# EAGLE board me433 (EAGLE 9.6.2)
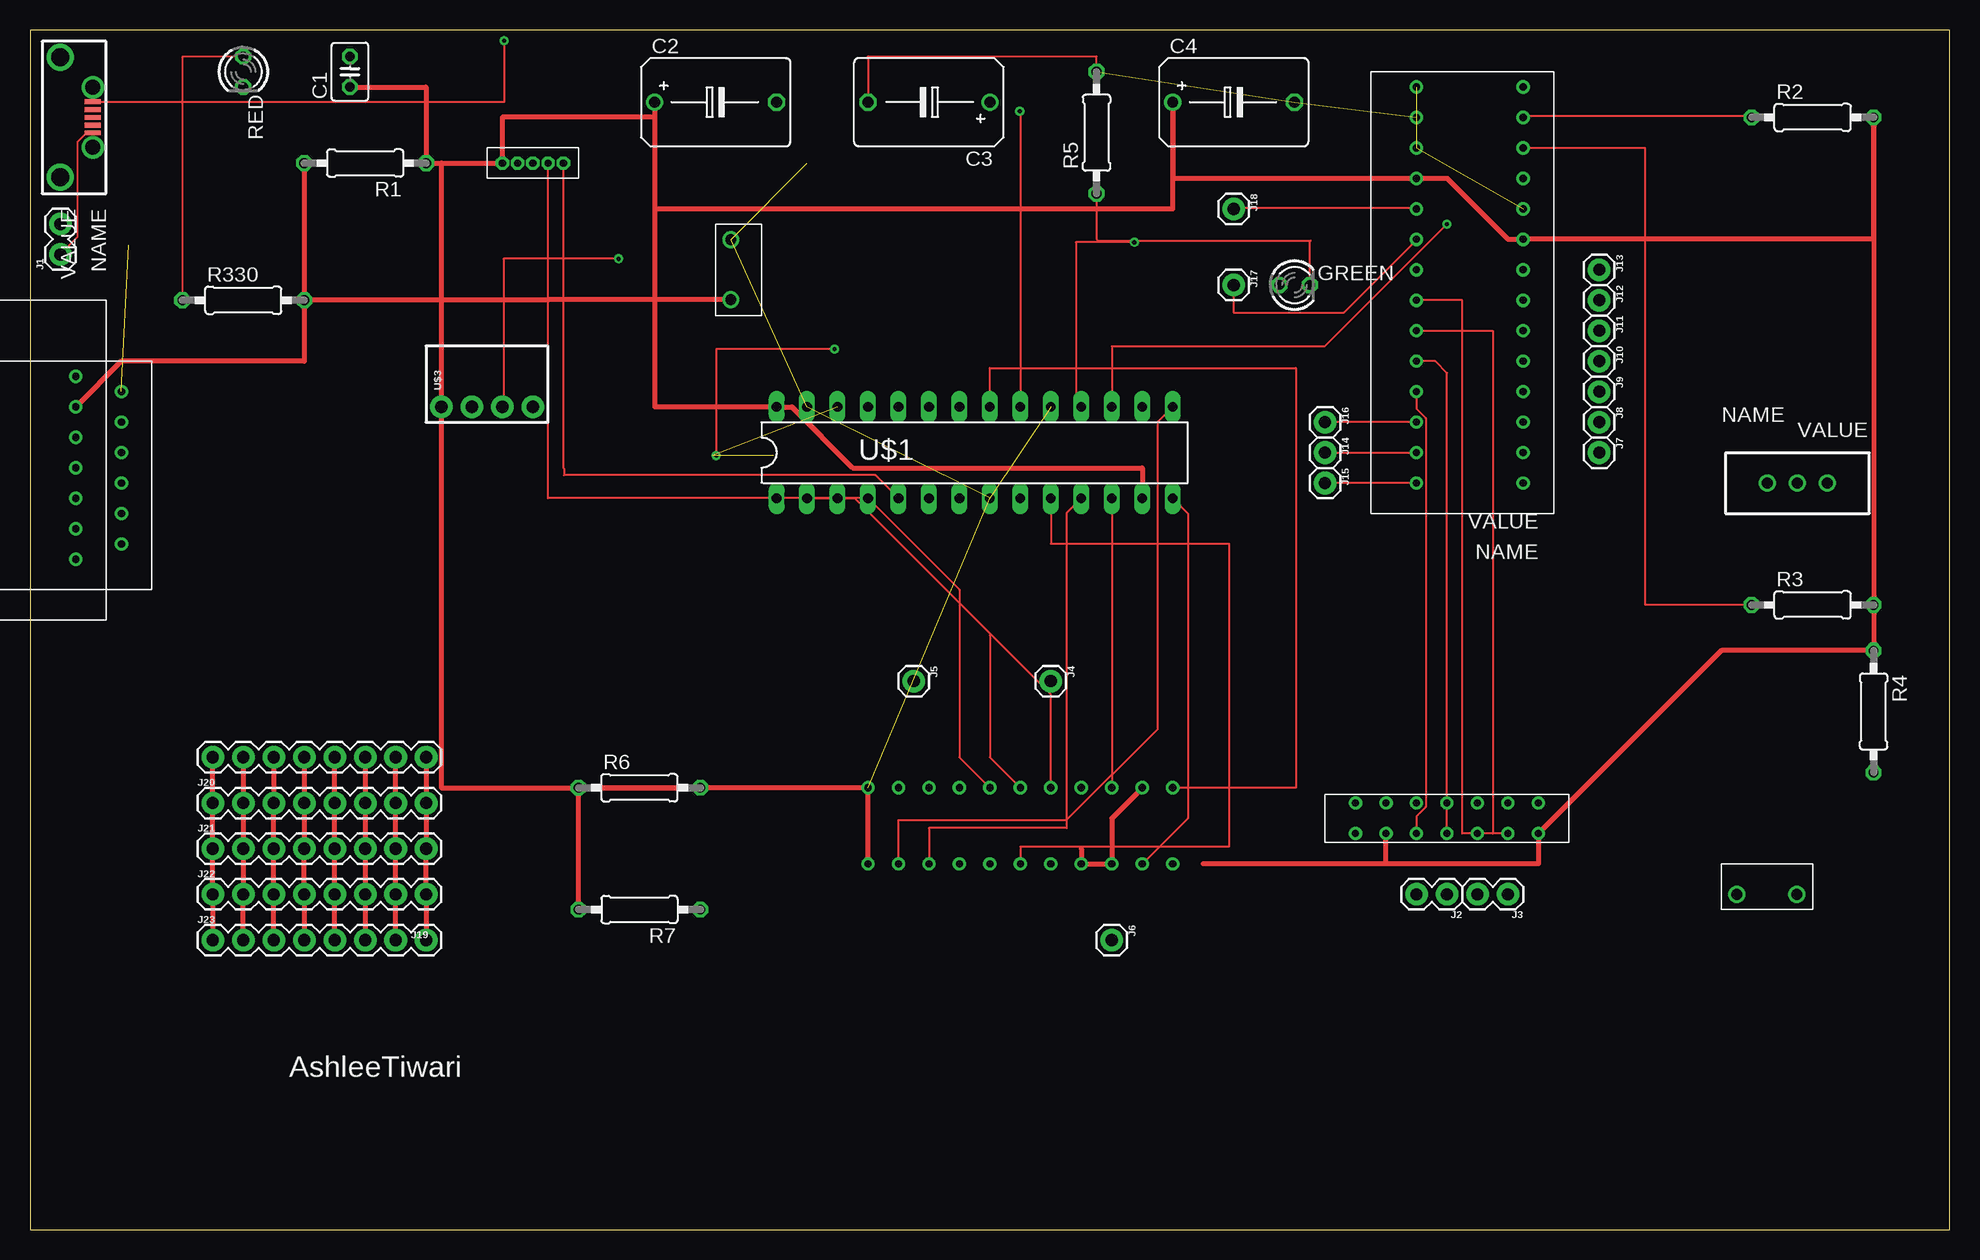
[diagram p0: board, top side]
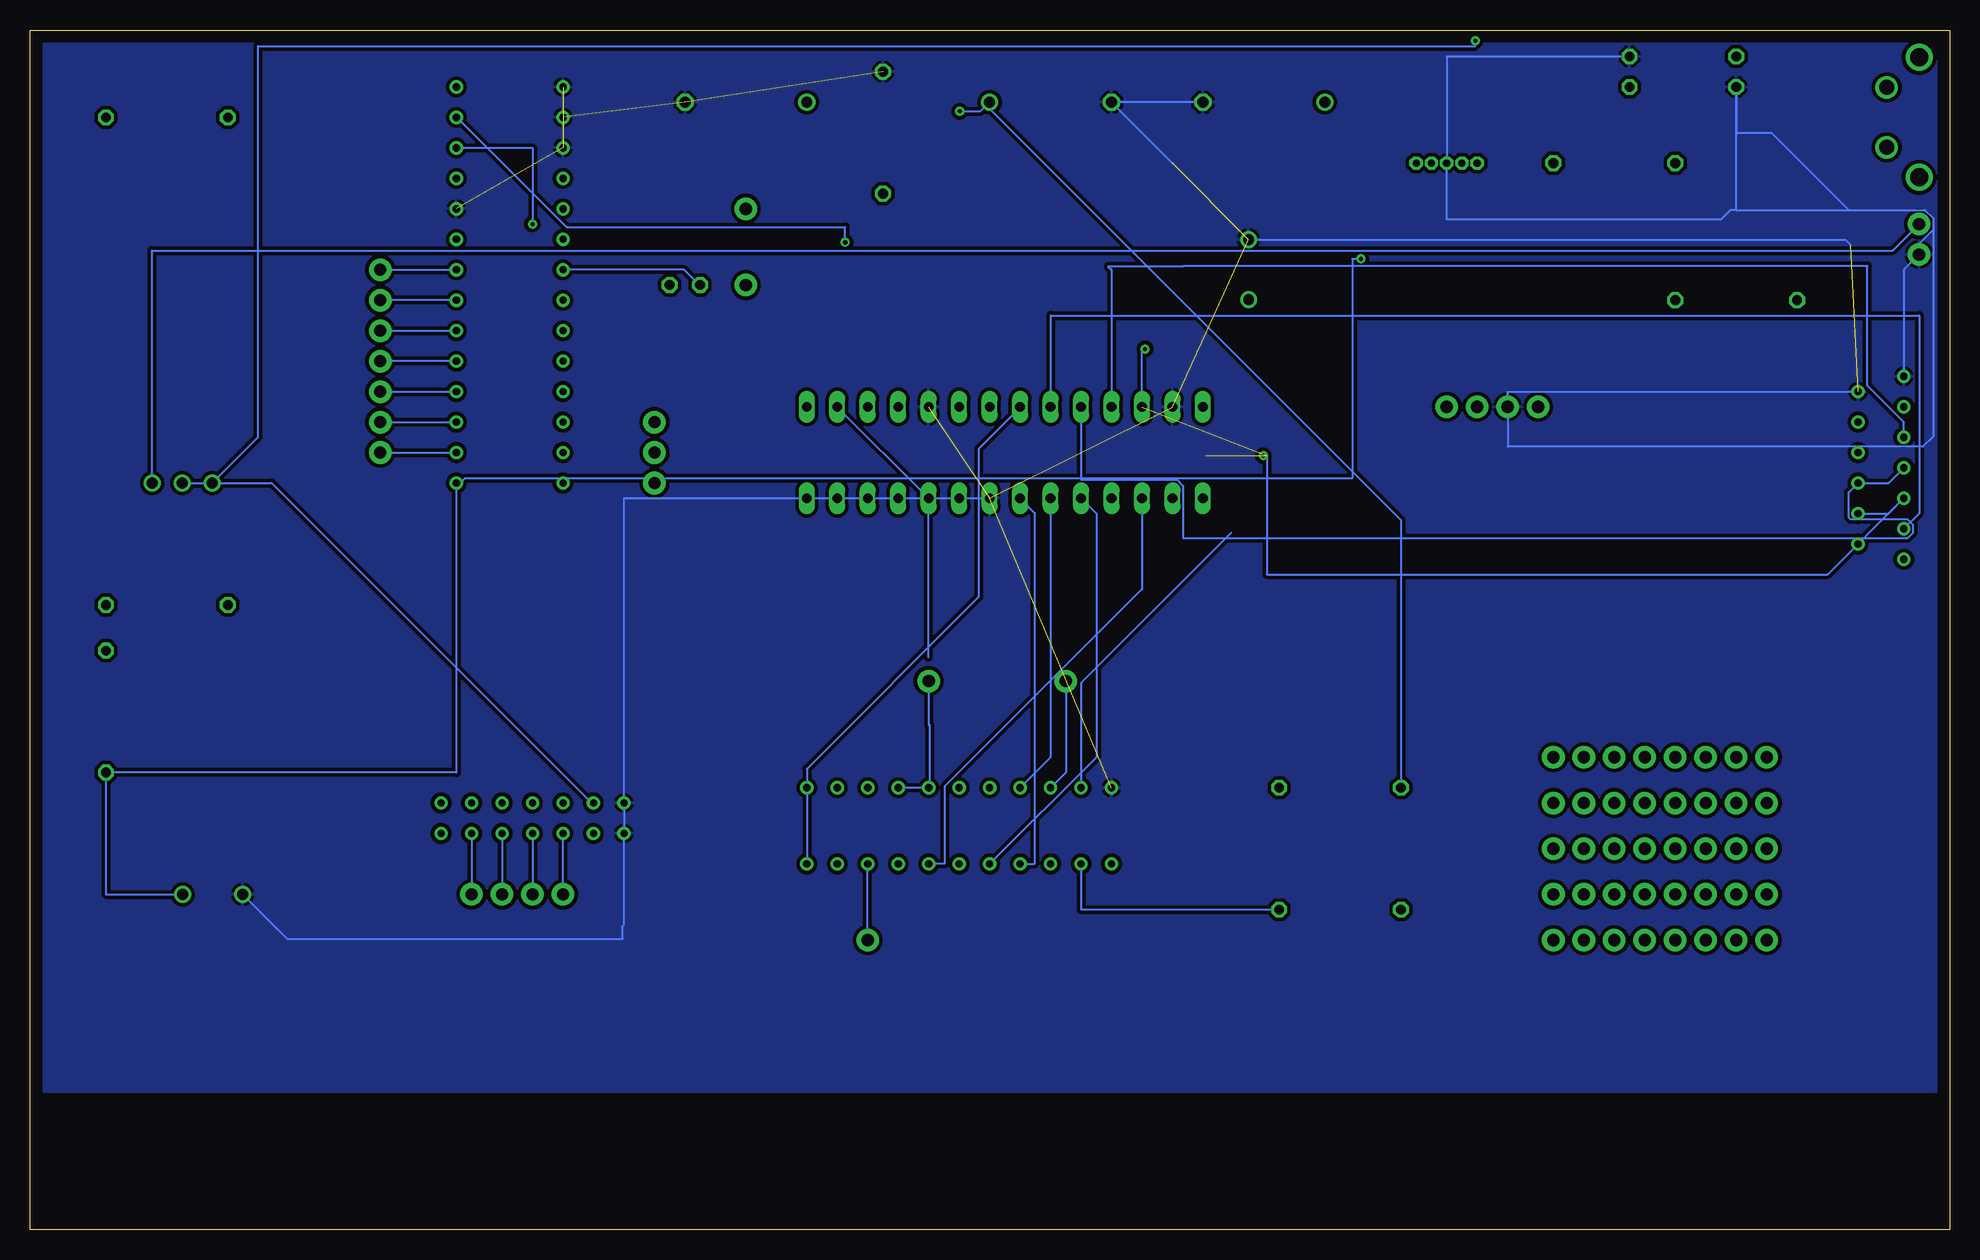
[diagram p1: board, bottom side, seen from below]

Size 160 x 100 mm. Coordinates in mm from the lower left corner, seen from the top.
Outline: 0,0 160,0 160,100 0,100 0,0
Copper layers (1*16): Top 0.035mm / dielectric 1.5mm / Bottom 0.035mm
Design rules "default": minimum track width 6mil, minimum drill 0.35mm, track to track 6mil, track to pad 6mil, pad to pad 6mil, via to via 6mil, smd to smd 6mil, copper to edge 40mil, drill to drill 6mil, minimum pad ring 10mil, minimum via ring 8mil, stop-mask expansion 4mil, vias tented up to drill 0mil, thermal gap 10mil

## Footprints (pad centres in the part's own frame; a part is rotated, then mirrored left to right if it is on the bottom)
C025-030X050 = drill 0.813 octagon: 1 -1.27,0; 2 1.27,0
B45181C = drill 0.914: + -5.08,0 | drill 0.914 octagon: - 5.08,0
LED3MM = drill 0.813 octagon: A -1.27,0; K 1.27,0
H_BRIDGE = drill 0.6: P$1 -1.27,7.62; P$2 -1.27,5.08; P$3 -1.27,2.54; P$4 -1.27,0; P$5 -1.27,-2.54; P$6 -1.27,-5.08; P$7 -1.27,-7.62; P$8 1.27,7.62; P$9 1.27,5.08; P$10 1.27,2.54; P$11 1.27,0; P$12 1.27,-2.54; P$13 1.27,-5.08; P$14 1.27,-7.62
1X02 = drill 1.016 pad 1.88: 1 0,0; 2 2.54,0
1X01 = drill 1.016 pad 1.88: 1 0,0
1X08 = drill 1.016 pad 1.88: 1 0,0; 2 2.54,0; 3 5.08,0; 4 7.62,0; 5 10.16,0; 6 12.7,0; 7 15.24,0; 8 17.78,0
0207/10 = drill 0.813 octagon: 1 -5.08,0; 2 5.08,0
PUSH = drill 0.9: P$1 -2.5,0; P$2 2.5,0
DIL28-3 = drill 0.813 long: 1 -16.51,-3.81; 2 -13.97,-3.81; 3 -11.43,-3.81; 4 -8.89,-3.81; 5 -6.35,-3.81; 6 -3.81,-3.81; 7 -1.27,-3.81; 8 1.27,-3.81; 9 3.81,-3.81; 10 6.35,-3.81; 11 8.89,-3.81; 12 11.43,-3.81; 13 13.97,-3.81; 14 16.51,-3.81; 15 16.51,3.81; 16 13.97,3.81; 17 11.43,3.81; 18 8.89,3.81; 19 6.35,3.81; 20 3.81,3.81; 21 1.27,3.81; 22 -1.27,3.81; 23 -3.81,3.81; 24 -6.35,3.81; 25 -8.89,3.81; 26 -11.43,3.81; 27 -13.97,3.81; 28 -16.51,3.81
MICROUSB = smd 0.4 x 1.35: 1.VBUS -1.3,2.7; 2 -0.65,2.7; 3 0,2.7; 4 0.65,2.7; 5.GND 1.3,2.7 | drill 1.25 pad 1.676: P$6 -2.5,2.7; P$7 2.5,2.7 | drill 1.5: P$8 -5,0; P$9 5,0
POLOLU3V3 = drill 1.016 pad 1.88: 1 -3.81,0; 2 -1.27,0; 3 1.27,0; 4 3.81,0
SLIDE = drill 0.9: 1 -2.5,0; 2 0,0; 3 2.5,0
FIFO_CAMERA = drill 0.6: P$1 -3.81,10.16; P$2 2.54,10.16; P$3 -3.81,7.62; P$4 2.54,7.62; P$5 -3.81,5.08; P$6 2.54,5.08; P$7 -3.81,2.54; P$8 2.54,2.54; P$9 -3.81,0; P$10 2.54,0; P$11 -3.81,-2.54; P$12 2.54,-2.54; P$13 -3.81,-5.08; P$14 2.54,-5.08; P$15 -3.81,-7.62; P$16 2.54,-7.62; P$17 -3.81,-10.16; P$18 2.54,-10.16; P$19 -3.81,-12.7; P$20 2.54,-12.7; P$21 -3.81,-15.24; P$22 2.54,-15.24
SNAP = drill 0.6 octagon: P$1 0,3.81; P$2 0,2.54; P$3 0,1.27; P$4 0,0; P$5 0,-1.27
USB_CON = drill 0.6: P$1 -8.89,2.54; P$2 -6.35,2.54; P$3 -3.81,2.54; P$4 -1.27,2.54; P$5 1.27,2.54; P$6 3.81,2.54
LCD = drill 0.6: P$1 -7.62,2.54; P$2 -5.08,2.54; P$3 -2.54,2.54; P$4 0,2.54; P$5 2.54,2.54; P$6 5.08,2.54; P$7 7.62,2.54
EXPANDER = drill 0.6: P$1 -6.35,12.7; P$2 -6.35,10.16; P$3 -6.35,7.62; P$4 -6.35,5.08; P$5 -6.35,2.54; P$6 -6.35,0; P$7 -6.35,-2.54; P$8 -6.35,-5.08; P$9 -6.35,-7.62; P$10 -6.35,-10.16; P$11 -6.35,-12.7; P$12 -6.35,-15.24; P$13 -6.35,-17.78; P$14 -6.35,-20.32; P$15 2.54,-20.32; P$16 2.54,-17.78; P$17 2.54,-15.24; P$18 2.54,-12.7; P$19 2.54,-10.16; P$20 2.54,-7.62; P$21 2.54,-5.08; P$22 2.54,-2.54; P$23 2.54,0; P$24 2.54,2.54; P$25 2.54,5.08; P$26 2.54,7.62; P$27 2.54,10.16; P$28 2.54,12.7

## Placement (x,y rotation side)
C1  0.1  [C025-030X050]  26.67,96.52 90 top
C2  0.1  [B45181C]  57.15,93.98 0 top
C3  10  [B45181C]  74.93,93.98 180 top
C4  0.1  [B45181C]  100.33,93.98 0 top
GREEN  [LED3MM]  105.41,78.74 0 top
HBRIDGE  H_BRIDGE  [H_BRIDGE]  118.11,34.29 90 top
J1  [1X02]  2.54,81.28 90 top
J2  [1X02]  118.11,27.94 180 top
J3  [1X02]  123.19,27.94 180 top
J4  [1X01]  85.09,45.72 270 top
J5  [1X01]  73.66,45.72 270 top
J6  [1X01]  90.17,24.13 270 top
J7  [1X01]  130.81,64.77 270 top
J8  [1X01]  130.81,67.31 270 top
J9  [1X01]  130.81,69.85 270 top
J10  [1X01]  130.81,72.39 270 top
J11  [1X01]  130.81,74.93 270 top
J12  [1X01]  130.81,77.47 270 top
J13  [1X01]  130.81,80.01 270 top
J14  [1X01]  107.95,64.77 270 top
J15  [1X01]  107.95,62.23 270 top
J16  [1X01]  107.95,67.31 270 top
J17  [1X01]  100.33,78.74 270 top
J18  [1X01]  100.33,85.09 270 top
J19  [1X08]  15.24,39.37 0 top
J20  [1X08]  15.24,35.56 0 top
J21  [1X08]  15.24,31.75 0 top
J22  [1X08]  15.24,27.94 0 top
J23  [1X08]  15.24,24.13 0 top
R1  10k  [0207/10]  27.94,88.9 180 top
R2  10k  [0207/10]  148.59,92.71 0 top
R3  10k  [0207/10]  148.59,52.07 0 top
R4  10k  [0207/10]  153.67,43.18 270 top
R5  10k  [0207/10]  88.9,91.44 90 top
R6  4.7k  [0207/10]  50.8,36.83 0 top
R7  4.7k  [0207/10]  50.8,26.67 180 top
R330  [0207/10]  17.78,77.47 0 top
RED  [LED3MM]  17.78,96.52 270 top
RESET  PUSH  [PUSH]  58.42,80.01 90 top
U$1  PIC32  [DIL28-3]  78.74,64.77 0 top
U$2  MICROUSB  [MICROUSB]  2.54,92.71 270 top
U$3  POLULU3V3  [POLOLU3V3]  38.1,68.58 0 top
U$4  SLIDE  [SLIDE]  147.32,62.23 0 top
U$5  FIFO_CAMERA  [FIFO_CAMERA]  80.01,34.29 90 top
U$6  SNAP  [SNAP]  43.18,88.9 90 top
U$7  USB_CON  [USB_CON]  5.08,60.96 270 top
U$8  LCD  [LCD]  1.27,63.5 270 top
U$10  EXPANDER  [EXPANDER]  118.11,74.93 180 top
USER  PUSH  [PUSH]  144.78,27.94 180 top

## Library data of the parts
C1-C4 = library; SPICEPREFIX: C
GREEN HBRIDGE J1-J18 RED RESET U$1-U$8 U$10 USER = library
J19-J23 = library; PROD_ID: CONN-08438
R1-R7 R330 = library; SPICEPREFIX: R

## Nets
+3V3: C1.1 C2.+ C4.+ HBRIDGE.P$2 HBRIDGE.P$7 R1.1 R1.2 R2.2 R3.2 R4.1 R6.2 R7.2 R330.2 RESET.P$1 U$1.13 U$1.28 U$3.1 U$5.P$1 U$6.P$1 U$8.P$2 U$10.P$9 U$10.P$18
+5V: U$2.1.VBUS U$4.1
ADIR: HBRIDGE.P$6 J3.1 U$10.P$22
APWM: HBRIDGE.P$5 J3.2 U$10.P$23
B0-PGD-D4: U$1.4 U$5.P$10 U$6.P$4
B1-PGC0-D5: U$1.5 U$5.P$9 U$6.P$5
B6: R7.1 U$1.15 U$5.P$3
B7: R6.1 U$1.16 U$5.P$4
B8: R3.1 U$1.17 U$10.P$12
B9: R2.1 U$1.18 U$10.P$13
B12: U$1.23 U$8.P$6
B13: U$1.24 U$7.P$4 U$8.P$4
B14: U$1.25 U$8.P$3
B15: U$1.26 U$7.P$5 U$8.P$5
BDIR: HBRIDGE.P$4 J2.1 U$10.P$24
BPWM: HBRIDGE.P$3 J2.2 U$10.P$25
D0: U$1.2 U$5.P$14
D1: U$1.3 U$5.P$13
D2: U$5.P$12
D3: U$1.10 U$5.P$11
D6: U$1.6 U$5.P$8
D7: U$1.7 U$5.P$7
GND: C1.2 C2.- C3.- C4.- HBRIDGE.P$1 HBRIDGE.P$8 J1.1 R5.2 RED.K RESET.P$2 U$1.8 U$1.19 U$1.27 U$2.5.GND U$3.2 U$5.P$2 U$6.P$3 U$7.P$1 U$8.P$1 U$10.P$10 U$10.P$15 U$10.P$16 U$10.P$17 USER.P$2
MCLR: U$1.1
N$1: C3.+ U$1.20
N$2: R330.1 RED.A
N$3: GREEN.A U$10.P$21
N$4: R4.2 U$10.P$1 USER.P$1
N$5: GREEN.K R5.1
N$6: J6.1 U$5.P$17
N$7: J4.1 U$5.P$16
N$8: U$5.P$6
N$9: J7.1 U$10.P$2
N$10: J8.1 U$10.P$3
N$11: J9.1 U$10.P$4
N$12: J10.1 U$10.P$5
N$13: J11.1 U$10.P$6
N$14: J12.1 U$10.P$7
N$15: J13.1 U$10.P$8
N$16: J14.1 U$10.P$27
N$17: J15.1 U$10.P$28
N$18: J16.1 U$10.P$26
N$19: J17.1 U$10.P$20
N$20: J18.1 U$10.P$19
N$21: J19.8 J20.8 J21.8 J22.8 J23.8
N$22: J19.7 J20.7 J21.7 J22.7 J23.7
N$23: J19.6 J20.6 J21.6 J22.6 J23.6
N$24: J19.5 J20.5 J21.5 J22.5 J23.5
N$25: J19.4 J20.4 J21.4 J22.4 J23.4
N$26: J19.3 J20.3 J21.3 J22.3 J23.3
N$27: J19.2 J20.2 J21.2 J22.2 J23.2
N$28: J19.1 J20.1 J21.1 J22.1 J23.1
RCK: U$1.12 U$5.P$18
RRST: U$1.21 U$5.P$22
S$1: J5.1
S$2: U$5.P$15 U$5.P$20
V+: J1.2 U$4.3
VIN: HBRIDGE.P$9 U$3.3 U$4.2
VSY: U$1.11 U$5.P$5
WR: U$1.14 U$5.P$19
WRST: U$1.22 U$5.P$21

## Tracks (layer width: path | path; a pad name or v marks a point on that pad's centre or on a via)
+3V3
  Top 0.406: 34.29,77.47 U$3.1 34.29,36.83 R6.2 | RESET.P$1 43.18,77.51 43.18,77.47 R330.2 | R1.2 R330.2 | R1.1 34.29,88.9 34.29,77.47 | 34.29,77.47 R330.2 | C1.1 33.02,95.25 R1.1 | R1.1 U$6.P$1 39.37,92.71 52.07,92.71 C2.+ | C2.+ 52.07,68.58 U$1.28 63.5,68.58 68.58,63.5 92.71,63.5 U$1.13 | R330.2 22.86,72.39 7.62,72.39 U$8.P$2 | R7.2 45.72,36.83 R6.2 | R6.2 69.85,36.83 U$5.P$1 | C2.+ 52.07,85.09 95.25,85.09 C4.+ 95.25,87.63 U$10.P$18 118.11,87.63 123.19,82.55 U$10.P$9 153.67,82.55 R2.2 R3.2 R4.1 140.97,48.26 HBRIDGE.P$7 125.73,30.48 113.03,30.48 | 113.03,30.48 HBRIDGE.P$2 | 113.03,30.48 97.79,30.48
+5V  (via drill 0.35)
  Top 0.152: v39.52,99.11 39.52,94.01 U$2.1.VBUS
  Bottom 0.152: v39.52,99.11 39.52,98.65 141.01,98.65 141.01,66.04 U$4.1
ADIR
  Top 0.152: HBRIDGE.P$6 119.38,33.02 119.38,77.47 U$10.P$22
  Bottom 0.152: HBRIDGE.P$6 J3.1
APWM
  Top 0.152: U$10.P$23 121.92,74.93 121.92,33.02 HBRIDGE.P$5
  Bottom 0.152: HBRIDGE.P$5 J3.2
B0-PGD-D4
  Top 0.152: U$6.P$4 43.18,60.96 U$1.4 77.47,53.34 77.47,39.37 U$5.P$10
B1-PGC0-D5
  Top 0.152: U$1.5 70.46,62.89 44.5,62.89 44.5,63.45 44.45,63.5 U$6.P$5
  Bottom 0.152: U$1.5 71.12,59.69 71.12,39.37 U$5.P$9
B6
  Top 0.152: U$1.15 93.98,67.31 93.98,41.71 86.41,34.14 72.39,34.14 U$5.P$3
  Bottom 0.152: U$5.P$3 72.39,26.67 R7.1
B7
  Bottom 0.152: U$5.P$4 72.39,45.57 59.89,58.06 | R6.1 45.72,59.13 80.37,93.78 | U$1.16 85.14,61.01 85.14,47.7
B8  (via drill 0.35)
  Top 0.152: U$10.P$12 134.62,90.17 134.62,52.07 R3.1 | U$1.17 90.17,73.61 107.9,73.61 v118.11,83.82
  Bottom 0.152: U$10.P$12 118.11,90.17 v118.11,83.82
B9  (via drill 0.35)
  Top 0.152: U$10.P$13 124.51,92.81 143.51,92.81 R2.1 | v92.05,82.3 87.17,82.3 87.17,68.53 87.53,68.53 U$1.18
  Bottom 0.152: v92.05,82.3 92.05,83.57 115.27,83.57 124.36,92.66 U$10.P$13
B12
  Bottom 0.152: U$8.P$6 2.54,59.69 2.54,76.2 74.93,76.2 U$1.23
B13
  Bottom 0.152: U$8.P$4 5.08,62.23 U$7.P$4 8.4,61.45 8.4,59.37 8.24,59.2 3.49,59.2 3.03,58.74 3.03,58.1 3.49,57.64 63.88,57.64 63.88,61.99 64.4,62.51 72.39,62.51 U$1.24
B14
  Bottom 0.152: U$8.P$3 3.81,67.31 6.84,70.34 6.84,80.31 63.84,80.31 63.87,80.29 70.13,80.29 69.85,80.01 U$1.25
B15  (via drill 0.35)  (3 unrouted)
  Top 0.152: v67.06,73.41 57.2,73.41 v57.2,64.52
  Bottom 0.152: U$7.P$5 5.08,59.69 U$8.P$5 10.16,54.61 56.9,54.61 56.9,64.52 v57.2,64.52 | U$1.26 67.31,73.15 v67.06,73.41
BDIR
  Top 0.152: U$10.P$24 117.14,72.39 118.11,71.42 HBRIDGE.P$4
  Bottom 0.152: HBRIDGE.P$4 J2.1
BPWM
  Top 0.152: U$10.P$25 115.57,68.42 116.35,67.63 116.35,35.24 115.57,34.45 HBRIDGE.P$3
  Bottom 0.152: J2.2 HBRIDGE.P$3
D0
  Top 0.152: U$5.P$14 85.09,44.6 68.73,60.96 U$1.2
D1
  Bottom 0.152: U$1.3 67.31,53.39 83.77,36.93 83.77,30.48 U$5.P$13
D2
  Top 0.152: 80.01,49.53 80.01,39.37 U$5.P$12
D3
  Top 0.152: U$5.P$11 82.55,31.9 99.97,31.9 99.97,57.15 85.09,57.15 U$1.10
D6
  Bottom 0.152: U$1.6 74.93,39.37 U$5.P$8
D7
  Bottom 0.152: U$1.7 76.25,59.74 76.25,30.48 U$5.P$7
GND  (11 unrouted)
  Top 0.152: R5.2 88.9,97.79 69.85,97.79 C3.- | U$2.5.GND 5.18,91.44 4.72,91.44 3.96,90.68 3.96,82.75 2.59,81.38 J1.1
  Bottom 0.152: J1.1 3.81,80.01 U$8.P$1 | 8.41,84.99 14.79,91.38 17.72,91.38 17.78,91.44 RED.K 17.8,95.22 17.8,84.99 | J1.1 2.54,82.17 1.37,83.34 | 17.8,84.99 18.26,84.99 19.05,84.2 41.91,84.2 U$6.P$3 41.91,97.79 C1.2 | RESET.P$2 8.69,82.51 8.24,82.06 | 17.8,84.99 8.41,84.99 | 8.41,84.99 2.06,84.99 1.37,84.3 1.37,83.34 | 1.37,83.34 1.37,66.1 2.22,65.26 36.83,65.26 U$3.2 36.83,69.85 U$7.P$1 | USER.P$2 138.57,24.23 110.59,24.23 110.59,25.3 110.49,25.4 HBRIDGE.P$1 HBRIDGE.P$8 110.49,60.96 U$1.8 | C2.- C3.- 64.77,88.9 | 2.59,81.38 J1.1
  pour Bottom (isolate 0.305): 160.02,11.43 160.02,100.33 0,100.33 0,11.43
N$1  (via drill 0.35)
  Top 0.152: v82.5,93.22 82.55,93.17 U$1.20
  Bottom 0.152: C3.+ 80.77,93.22 v82.5,93.22
N$2
  Top 0.152: RED.A 12.7,97.79 R330.1
N$3
  Bottom 0.152: U$10.P$21 105.46,80.01 104.24,78.79 GREEN.A
N$4
  Bottom 0.152: U$10.P$1 124.46,38.1 R4.2 153.67,27.94 USER.P$1
N$5
  Top 0.152: R5.1 88.9,82.55 89,82.45 106.77,82.45 106.68,82.36 GREEN.K
N$6
  Bottom 0.152: J6.1 U$5.P$17
N$7
  Bottom 0.152: J4.1 85.09,42.11 | 85.09,42.11 85.09,42.05 | U$5.P$16 85.04,36.83 85.04,42.11 85.09,42.11
N$8
  Bottom 0.152: U$5.P$6 73.66,38.1 73.66,45.72
N$9
  Bottom 0.152: J7.1 U$10.P$2
N$10
  Bottom 0.152: J8.1 U$10.P$3
N$11
  Bottom 0.152: J9.1 U$10.P$4
N$12
  Bottom 0.152: U$10.P$5 J10.1
N$13
  Bottom 0.152: J11.1 U$10.P$6
N$14
  Bottom 0.152: U$10.P$7 J12.1
N$15
  Bottom 0.152: J13.1 U$10.P$8
N$16
  Top 0.152: J14.1 U$10.P$27
N$17
  Top 0.152: U$10.P$28 J15.1
N$18
  Top 0.152: U$10.P$26 J16.1
N$19
  Top 0.152: J17.1 100.33,76.45 109.53,76.45 115.52,82.45 U$10.P$20
N$20
  Top 0.152: U$10.P$19 115.52,85.19 100.43,85.19 J18.1
N$21
  Top 0.152: J20.8 33.07,35.51 33.02,35.51
  Top 0.406: J19.8 J20.8 33.02,35.51 J21.8 J22.8 J23.8
N$22
  Top 0.406: J23.7 J22.7 J21.7 J20.7 J19.7
N$23
  Top 0.406: J19.6 J20.6 J21.6 J22.6 J23.6
N$24
  Top 0.406: J23.5 J22.5 J21.5 J20.5 J19.5
N$25
  Top 0.406: J19.4 J20.4 J21.4 J22.4 J23.4
N$26
  Top 0.406: J23.3 J22.3 J21.3 J20.3 J19.3
N$27
  Top 0.406: J19.2 J20.2 J21.2 J22.2 J23.2
N$28
  Top 0.406: J23.1 J22.1 J21.1 J20.1 J19.1
RCK
  Top 0.152: U$1.12 U$5.P$18
RRST
  Top 0.152: U$1.21 80.01,71.83 105.51,71.83 105.51,36.83 U$5.P$22
S$1
  Bottom 0.152: J5.1 74.3,45.09
S$2
  Top 0.406: U$5.P$20 90.17,34.29 90.17,30.48 U$5.P$15 87.63,31.75
V+
  Bottom 0.152: U$4.3 149.82,81.62 4.74,81.62 J1.2
VIN  (via drill 0.35)
  Top 0.152: U$3.3 39.47,68.68 39.47,80.92 v49.07,80.92
  Bottom 0.152: U$4.2 139.86,62.23 113.03,35.4 HBRIDGE.P$9 | 124.62,62.23 124.39,62 123.75,62.64 49.78,62.64 49.78,80.92 v49.07,80.92
VSY
  Top 0.152: U$1.11 86.41,59.74 86.41,33.48 74.93,33.48 U$5.P$5
WR
  Top 0.152: U$1.14 96.52,59.69 96.52,34.29 U$5.P$19
WRST
  Bottom 0.152: U$5.P$21 95.25,38.41 80.92,52.73 80.92,65.08 77.47,68.53 U$1.22

## Text on the board
tPlace: AshleeTiwari